# EAGLE board groundStation (EAGLE 9.6.2)

Size 100 x 80 mm. Coordinates in mm from the lower left corner, seen from the top.
Outline: 0,0 100,0 100,80 0,80 0,0
Copper layers (1*16): Top 0.035mm / dielectric 1.5mm / Bottom 0.035mm
Design rules "default": minimum track width 6mil, minimum drill 0.35mm, track to track 6mil, track to pad 6mil, pad to pad 6mil, via to via 6mil, smd to smd 6mil, copper to edge 40mil, drill to drill 6mil, minimum pad ring 10mil, minimum via ring 8mil, stop-mask expansion 4mil, vias tented up to drill 0mil, thermal gap 10mil

## Footprints (pad centres in the part's own frame; a part is rotated, then mirrored left to right if it is on the bottom)
BATTERY_18650-HOLDER = drill 1.829: GND@1 30.628,0.01; GND@2 23.88,2.55; GND@3 23.88,-2.53; PWR@1 -30.628,-0.01; PWR@2 -23.88,2.53; PWR@3 -23.88,-2.55
0603 = smd 1.1 x 1: 1 -0.85,0; 2 0.85,0
SOP-8 = smd 1.3 x 0.7: 1 -2.75,1.905; 2 -2.75,0.635; 3 -2.75,-0.635; 4 -2.75,-1.905; 5 2.75,-1.905; 6 2.75,-0.635; 7 2.75,0.635; 8 2.75,1.905
BU-SMA-V = drill 1.27: 1 0,0 | drill 1.778: 2 -2.55,2.55; 3 2.55,2.55; 4 2.55,-2.55; 5 -2.55,-2.55
DCJ0202 = drill 1 pad 2 long: 1 0,3.1; 2 4.8,0; 3 0,-3
L0603 = smd 0.8 x 0.8: 1 -0.762,0; 2 0.762,0
04P = drill 0.914 long: 1 -3.81,0; 2 -1.27,0; 3 1.27,0; 4 3.81,0
R0603 = smd 1 x 1.1: 1 -0.85,0; 2 0.85,0
ESP12E_DEVKIT = drill 0.8 pad 1.93: 3V3@0 -11.43,-7.62; 3V3@1 11.43,5.08; 3V3@2 11.43,-17.78; AD0 -11.43,17.78; CLK -11.43,-2.54; CMD -11.43,2.54; D0 11.43,17.78; D1 11.43,15.24; D2 11.43,12.7; D3 11.43,10.16; D4 11.43,7.62; D5 11.43,0; D6 11.43,-2.54; D7 11.43,-5.08; D8 11.43,-7.62; EN -11.43,-10.16; GND@0 -11.43,-5.08; GND@1 -11.43,-15.24; GND@2 11.43,2.54; GND@3 11.43,-15.24; RST -11.43,-12.7; RSV@0 -11.43,15.24; RSV@1 -11.43,12.7; RX 11.43,-10.16; SD0 -11.43,0; SD1 -11.43,5.08; SD2 -11.43,7.62; SD3 -11.43,10.16; TX 11.43,-12.7; VIN -11.43,-17.78 | hole 3.2: -10.16,21.59; 10.16,21.59; 10.16,-21.59; -10.16,-21.59
POLOLU-DRV8825 = drill 0.8 pad 1.676: A1 6.35,-1.27; A2 6.35,-3.81; B1 6.35,1.27; B2 6.35,3.81; DIR -6.35,-8.89; EN_N -6.35,8.89; FLT_N 6.35,-6.35; M0 -6.35,6.35; M1 -6.35,3.81; M2 -6.35,1.27; RST_N -6.35,-1.27; SLP_N -6.35,-3.81; STEP_N -6.35,-6.35; VMOT 6.35,8.89 | drill 0.8 pad 1.676 square: GND 6.35,-8.89; GND2 6.35,6.35
RFFM6406 = smd 0.55 x 0.5: 1 0.375,5.65; 8 0.375,0.35; 15 5.625,0.35; 22 5.625,5.65 | smd 0.55 x 0.4: 2 0.375,4.812; 3 0.375,4.087; 4 0.375,3.362; 5 0.375,2.637; 6 0.375,1.912; 7 0.375,1.187; 16 5.625,1.187; 17 5.625,1.912; 18 5.625,2.637; 19 5.625,3.362; 20 5.625,4.087; 21 5.625,4.812 | smd 0.4 x 0.55: 9 1.187,0.375; 10 1.912,0.375; 11 2.637,0.375; 12 3.362,0.375; 13 4.087,0.375; 14 4.812,0.375; 23 4.812,5.625; 24 4.087,5.625; 25 3.362,5.625; 26 2.637,5.625; 27 1.912,5.625; 28 1.187,5.625 | smd 3.875 x 3.875: D 3,3
PSA4-5043+ = smd 0.6 x 0.8: 1 -0.65,-0.9; 3 0.65,0.9; 4 -0.65,0.9 | smd 0.9 x 0.8: 2 0.5,-0.9

## Placement (x,y rotation side)
BT1  [BATTERY_18650-HOLDER]  -8.89,-147.32 0 top  (outside the outline)
C1  10uf  [0603]  -33.02,-91.44 0 top  (outside the outline)
C2  220nf  [0603]  -33.02,-121.92 0 top  (outside the outline)
C3  1uf  [0603]  -33.02,-125.73 0 top  (outside the outline)
C4  1uf  [0603]  -33.02,-129.54 0 top  (outside the outline)
C5  4.7pF  [0603]  -38.1,-190.5 0 top  (outside the outline)
C6  10uf  [0603]  -33.02,-87.63 0 top  (outside the outline)
C10  4.7pF  [0603]  -34.29,-190.5 0 top  (outside the outline)
IC1  TP4056  [SOP-8]  -22.86,-71.12 0 top  (outside the outline)
IN  BU-SMA-V  [BU-SMA-V]  -40.64,-181.61 0 top  (outside the outline)
J1  DCJ0202  [DCJ0202]  -36.83,-163.83 0 top  (outside the outline)
L1  10uH  [L0603]  -41.91,-190.5 0 top  (outside the outline)
MOTOR_CONN  [04P]  6.35,-55.88 0 top  (outside the outline)
MOTOR_CONN1  [04P]  22.86,-30.48 0 top  (outside the outline)
R1  .4ohm  [R0603]  -34.29,-96.52 0 top  (outside the outline)
R2  [R0603]  -34.29,-83.82 0 top  (outside the outline)
R3  [R0603]  -34.29,-102.87 0 top  (outside the outline)
R4  50ohm  [R0603]  -34.29,-106.68 0 top  (outside the outline)
R5  50ohm  [R0603]  -34.29,-110.49 0 top  (outside the outline)
R6  50ohm  [R0603]  -34.29,-114.3 0 top  (outside the outline)
R7  50ohm  [R0603]  -34.29,-118.11 0 top  (outside the outline)
R8  50ohm  [R0603]  -34.29,-134.62 0 top  (outside the outline)
R_PROG  [R0603]  -34.29,-80.01 0 top  (outside the outline)
U$1  ESP12E_DEVKIT  [ESP12E_DEVKIT]  -13.97,-33.02 0 top  (outside the outline)
U$2  POLOLU-DRV8825  [POLOLU-DRV8825]  8.89,-12.7 0 top  (outside the outline)
U$3  RFFM6404  [RFFM6406]  -26.67,-64.77 0 top  (outside the outline)
U$4  POLOLU-DRV8825  [POLOLU-DRV8825]  8.89,-38.1 0 top  (outside the outline)
U$5  PSA4-5043+  [PSA4-5043+]  -43.18,-194.31 0 top  (outside the outline)

## Library data of the parts
BT1 = SparkFun-Batteries; PROD_ID: BATT-12327; SF_SKU: PRT-13113
C1-C4 C6 = SparkFun-Capacitors; PROD_ID: CAP-08390
C5 C10 = SparkFun-Capacitors; PROD_ID: CAP-11015
IC1 = TP4056
IN = con-coax; OC_FARNELL: unknown; OC_NEWARK: unknown
J1 = con-jack; OC_FARNELL: unknown; OC_NEWARK: unknown
L1 = rc-master-smd
MOTOR_CONN MOTOR_CONN1 = con-amp-quick; OC_FARNELL: unknown; OC_NEWARK: unknown
R1-R8 R_PROG = adafruit
U$1 = ESP12E_DEVKIT
U$2 U$4 = alvarop-lib
U$3 = RFFM6406
U$5 = PSA4-5043_; AVAILABILITY: Unavailable; DESCRIPTION: Ultra Low Noise MMIC Amplifier, 50ohm, 0.05 to 4 GHz; MF: Mini-Circuits; MP: PSA4-5043+; PACKAGE: None; PRICE: None

## Nets
3V3@0: U$1.3V3@0
3V3@1: U$1.3V3@1
3V3@2: U$1.3V3@2
AD0: U$1.AD0
ANT: R7.1
CLK: U$1.CLK
CMD: U$1.CMD
D5: U$1.D5
D6: U$1.D6
D7: U$1.D7
D8: U$1.D8
DIR1: U$1.D1 U$2.DIR
DIR2: U$1.D3 U$4.DIR
EN: U$1.EN
GND: BT1.GND@1 C1.1 C2.1 C3.2 C4.2 C6.1 IC1.3 J1.3 R_PROG.1 U$1.GND@0 U$1.GND@1 U$1.GND@2 U$1.GND@3 U$2.GND U$2.GND2 U$3.1 U$3.6 U$3.8 U$3.9 U$3.11 U$3.12 U$3.15 U$3.19 U$3.21 U$3.22 U$3.27 U$3.28 U$3.D U$4.GND U$4.GND2
GND3: IN.2 IN.3 IN.4 IN.5 U$5.2 U$5.4
N$1: BT1.PWR@1 C6.2 IC1.5
N$2: C1.2 IC1.4 IC1.8 R1.1
N$3: IC1.2 R_PROG.2
N$4: R3.2 R8.2 U$3.10
N$5: MOTOR_CONN.1 U$2.B2
N$6: R3.1 R8.1
N$7: R7.2 U$3.7
N$8: MOTOR_CONN.2 U$2.B1
N$9: C2.2 U$3.5
N$10: MOTOR_CONN.3 U$2.A1
N$11: MOTOR_CONN.4 U$2.A2
N$12: R4.2 U$3.13
N$13: R5.2 U$3.20
N$14: R6.2 U$3.18
N$15: U$3.17
N$16: MOTOR_CONN1.1 U$4.B2
N$17: U$3.23
N$18: U$3.24
N$19: U$3.2
N$20: U$3.3
N$21: U$3.4
N$23: C5.2
N$24: C10.1 IN.1
N$25: C10.2 U$5.3
N$26: C5.1 L1.2 U$5.1
N$42: MOTOR_CONN1.2 U$4.B1
N$43: MOTOR_CONN1.3 U$4.A1
N$44: MOTOR_CONN1.4 U$4.A2
RAW_VCC: J1.1 L1.1 R1.2 U$1.VIN
RST: U$1.RST
RSV@0: U$1.RSV@0
RSV@1: U$1.RSV@1
RX: U$1.RX
SD0: U$1.SD0
SD1: U$1.SD1
SD2: U$1.SD2
SD3: U$1.SD3
SLEEP: U$1.D4 U$2.RST_N U$2.SLP_N U$4.RST_N U$4.SLP_N
STEP1: U$1.D0 U$2.STEP_N
STEP2: U$1.D2 U$4.STEP_N
TX: U$1.TX
V_EXTERNAL: U$2.VMOT U$4.VMOT
VCC_TX2: C3.1 C4.1 U$3.26

## Tracks (layer width: path | path; a pad name or v marks a point on that pad's centre or on a via)
DIR1  (1 unrouted)
DIR2  (1 unrouted)
GND  (29 unrouted)
GND3  (5 unrouted)
N$1  (2 unrouted)
N$2  (3 unrouted)
N$3  (1 unrouted)
N$4  (2 unrouted)
N$5  (1 unrouted)
N$6  (1 unrouted)
N$7  (1 unrouted)
N$8  (1 unrouted)
N$9  (1 unrouted)
N$10  (1 unrouted)
N$11  (1 unrouted)
N$12  (1 unrouted)
N$13  (1 unrouted)
N$14  (1 unrouted)
N$16  (1 unrouted)
N$24  (1 unrouted)
N$25  (1 unrouted)
N$26  (2 unrouted)
N$42  (1 unrouted)
N$43  (1 unrouted)
N$44  (1 unrouted)
RAW_VCC  (3 unrouted)
SLEEP  (4 unrouted)
STEP1  (1 unrouted)
STEP2  (1 unrouted)
V_EXTERNAL  (1 unrouted)
VCC_TX2  (2 unrouted)